# Altium PCB PCB_door_key.PcbDoc
Units mil, origin at the board's own origin, x right, y up, seen from the top; angles counter-clockwise.
Board outline 6000 x 4000 mil, 2 copper layers (Top Layer, Bottom Layer); 7 components, 17 nets, 39 pads, 0 vias.
Unrouted connection lines stored in the file: 13.
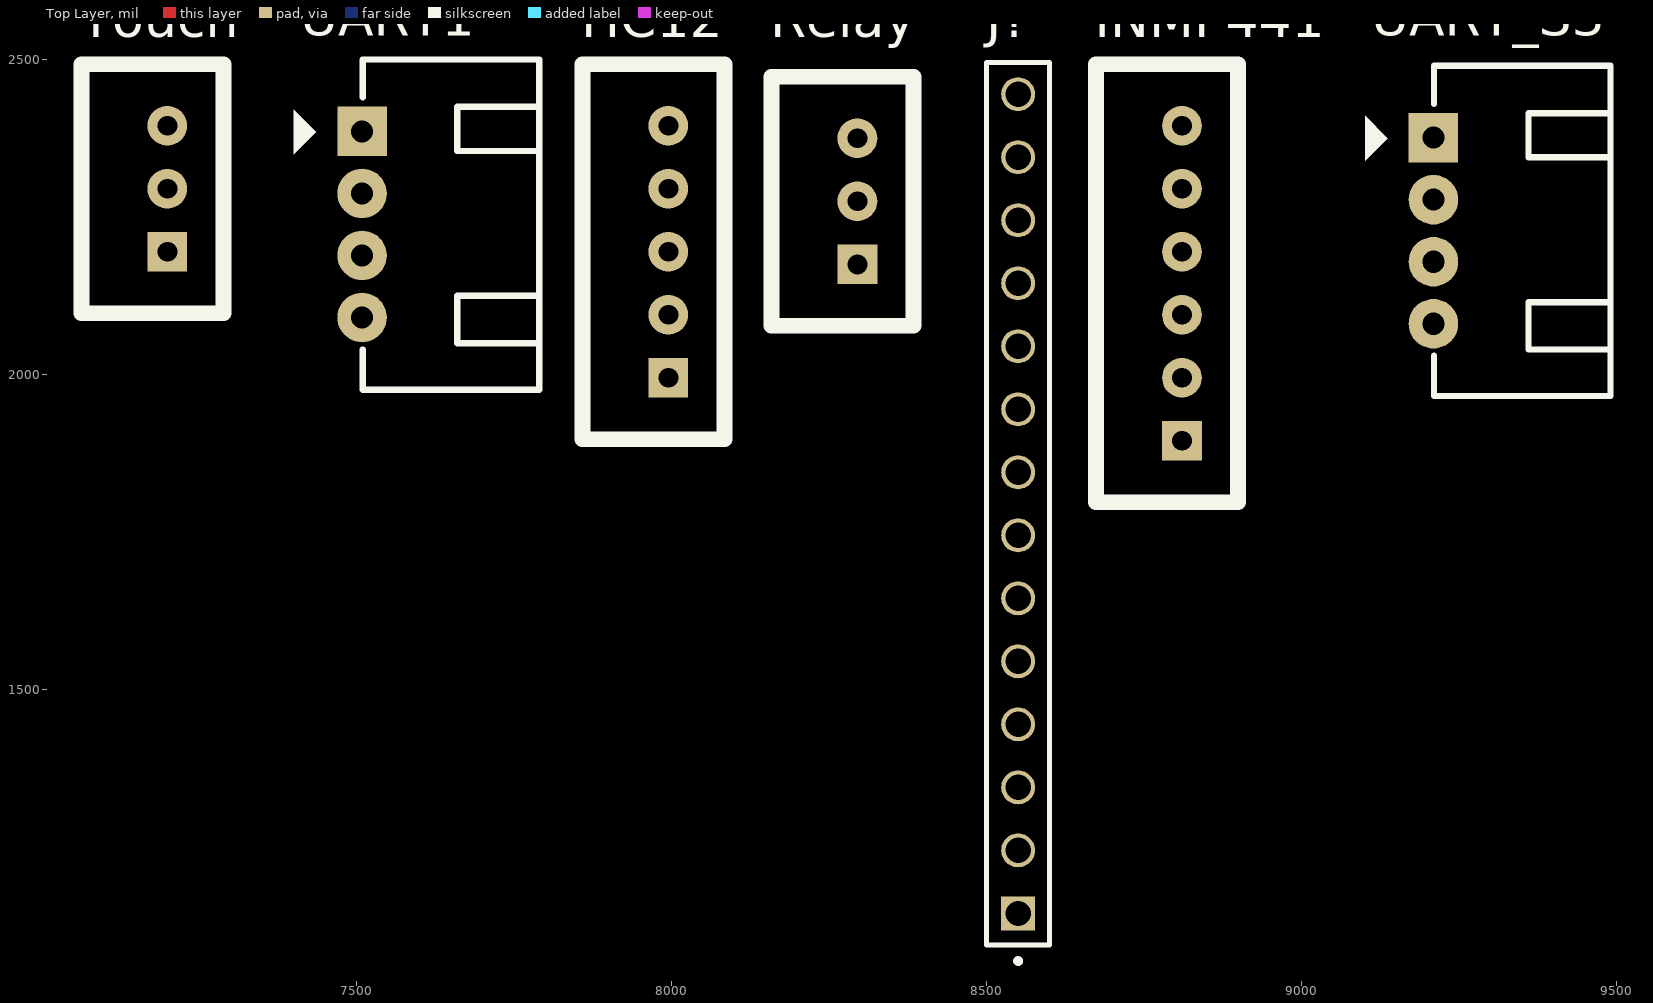
[diagram p0: Top Layer view]
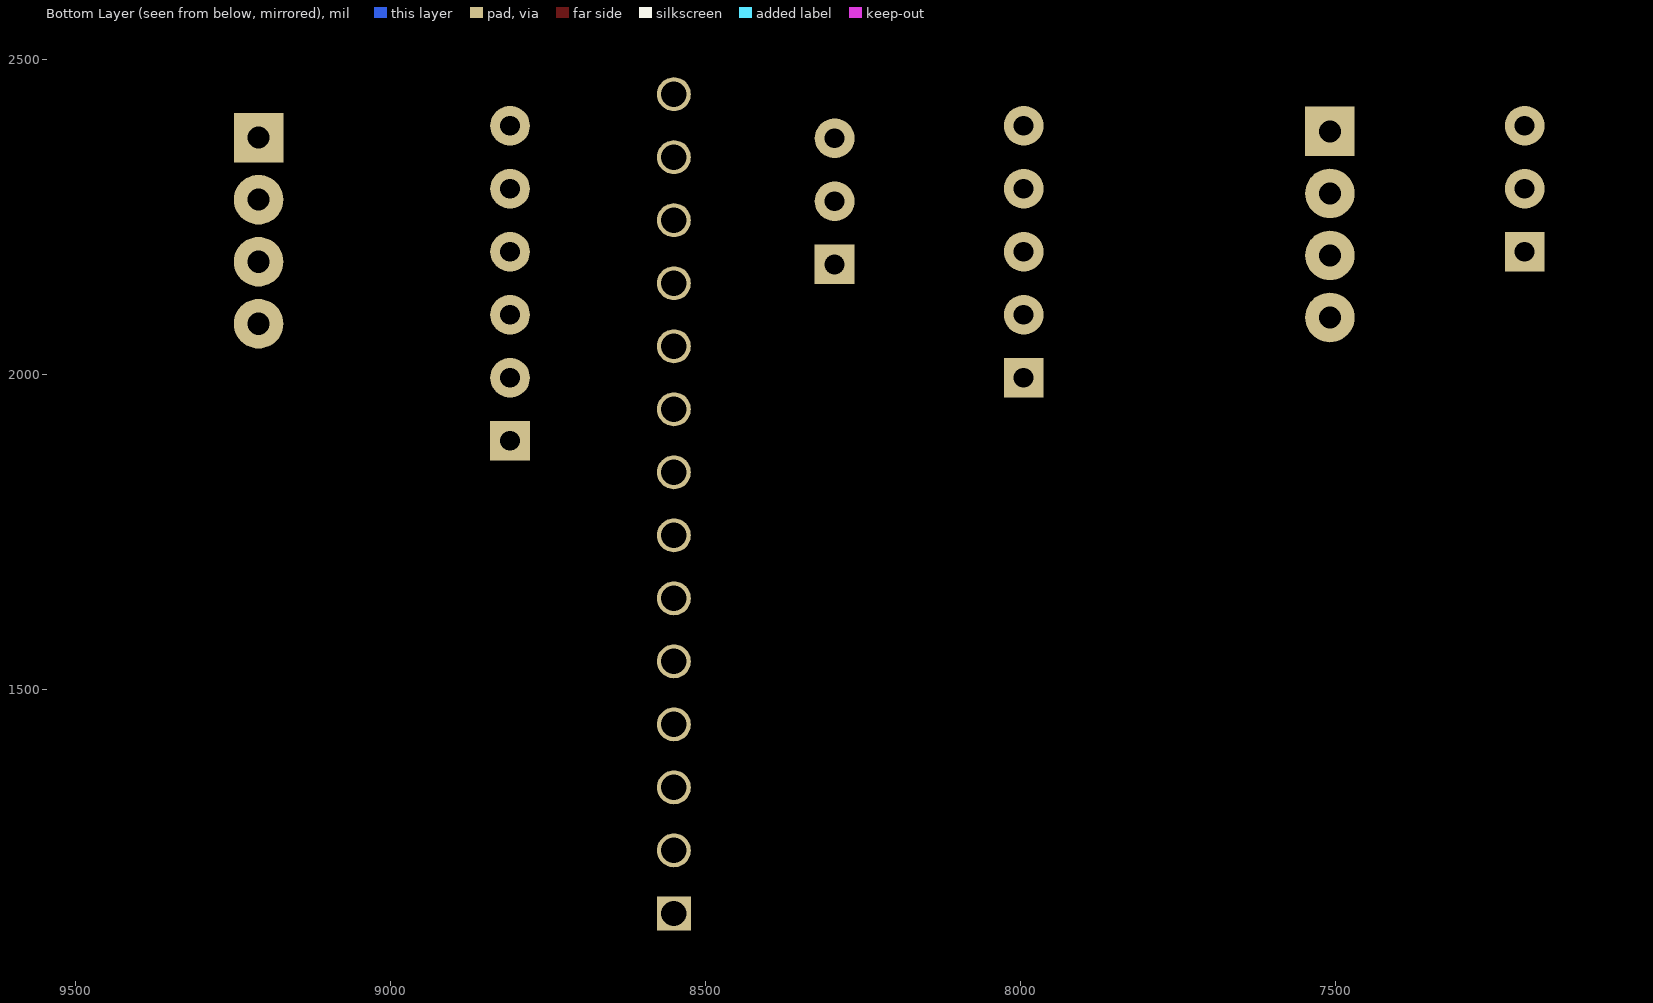
[diagram p1: Bottom Layer view, seen from below]

## Layer stack, top to bottom
Top Solder: solder mask 0.4, Solder Resist, Dk 3.5
Top Layer: signal copper 1.4
Dielectric 1: dielectric 12.6, FR-4, Dk 4.8
Bottom Layer: signal copper 1.4
Bottom Solder: solder mask 0.4, Solder Resist, Dk 3.5

## Board outline
1000,1000 7000,1000 7000,5000 1000,5000

## Design rules (kind name [scope] priority, off if disabled: settings)
Clearance [All] p1: gap=10 ignorepadtopadclearanceinfootprint=FALSE
PolygonConnect [All] p1: connectstyle=Relief reliefconductorwidth=10 reliefentries=4 polygonreliefangle="90 Angle" airgapwidth=10
RoomDefinition Sch_door_key [InComponentClass('Sch_door_key')] p1: confinementstyle=ConfineIn formatcopy=TRUE lockcomponents=FALSE outline 7045,1055 9530,1055 9530,2615 7045,2615
RoutingVias [All] p1: holewidth=28 width=50 viastyle="Through Hole" minholewidth=28 minwidth=50 maxholewidth=28 maxwidth=50
SolderMaskExpansion [All] p1: expansion=4 istentingtop=FALSE
Width [All] p1: maxlimit=10 minlimit=10 preferedwidth=10
30 further rules are at their usual default settings.

## Components (designator, comment, footprint, x,y, rotation, side; value= is the part's Value field where it differs from the comment)
HC12 "HC-12" XH2.54M-5 7995,1995 r90 top
INMP441 "INMP441" XH2.54M-6 8810,1895 r90 top
J? "Display" SAMTEC_TSW-114-07-L-S-LL 8550,1145 r90 top
Relay "Servo" XH2.54M-3 8295,2175 r90 top
Touch "IR_Receive" XH2.54M-3 7200,2195 r90 top
UART1 "UART1" "Header 4P DC 2.54" 7510,2385 r0 top
UART_S3 "UART_S3" "Header 4P DC 2.54" 9210,2375 r0 top

## Footprints (in the part's own frame and the unit in brackets; to place one, negate y for a bottom-side part, rotate by r counter-clockwise, add the part's x,y. Pads: shape width x height; smd on the part's side, far side on the other; paste and mask are expansions set on the pad)
"Header 4P DC 2.54" [mil]
  rect 78.74x78.74 hole 35: 1(-1,1)
  round 78.74 hole 35: 2(-1,-97.43) 3(-1,-195.85) 4(-1,-294.28)
  silkscreen extent -110,-409 280,115, body extent 5,-413 278,123, height 290
SAMTEC_TSW-114-07-L-S-LL [mm]
  rect 1.37x1.37 hole 1.02: 01(0,0)
  round 1.37 hole 1.02: 02(2.54,0) 03(5.08,0) 04(7.62,0) 05(10.16,0) 06(12.7,0) 07(15.24,0) 08(17.78,0) 09(20.32,0) 10(22.86,0) 11(25.4,0) 12(27.94,0) 13(30.48,0) 14(33.02,0)
  silkscreen extent -2.02,-1.27 34.29,1.27
XH2.54M-3 [mm]
  rect 1.6x1.6 hole 0.8: 1(0,0)
  round 1.6 hole 0.8: 2(2.54,0) 3(5.08,0)
  silkscreen extent -2.48,-2.26 7.56,3.46, body extent -2.48,-2.26 7.56,3.48, height 6.91
XH2.54M-5 [mm]
  rect 1.6x1.6 hole 0.8: 1(0,0)
  round 1.6 hole 0.8: 2(2.54,0) 3(5.08,0) 4(7.62,0) 5(10.16,0)
  silkscreen extent -2.48,-2.26 12.64,3.46, body extent -2.48,-2.26 12.64,3.48, height 6.91
XH2.54M-6 [mm]
  rect 1.6x1.6 hole 0.8: 1(0,0)
  round 1.6 hole 0.8: 2(2.54,0) 3(5.08,0) 4(7.62,0) 5(10.16,0) 6(12.7,0)
  silkscreen extent -2.48,-2.26 15.18,3.46, body extent -2.48,-2.26 15.18,3.48, height 6.91

## Part data
HC12: library part "Header 5P 2.54 Duc Thang", "Cắm", Chung_Loai=Cắm, Don_Vi=Con, Ma_Hang=MH001298, Ten_Linh_Kien="Header 5P XH2.54-5P Đực Thẳng"
INMP441: library part "Header 6P 2.54 Duc Thang", "Cắm", Chung_Loai=Cắm, Don_Vi=Con, Ma_Hang=MH001972, Ten_Linh_Kien="Header 6P XH2.54-6P Đực Thẳng"
J?: library part TSW-114-07-L-S-LL, Package=None, Availability=Unavailable, MP=TSW-114-07-L-S-LL, Price=None
Relay Touch: library part "Header 3P 2.54 Duc Thang", "Cắm", Chung_Loai=Cắm, Don_Vi=Con, Ma_Hang=MH001292, Ten_Linh_Kien="Header 3P XH2.54-3P Đực Thẳng"
UART1 UART_S3: library part "Header 4P 2.54 Duc Cong", "Cắm", Chung_Loai=Cắm, Don_Vi=Con, Ma_Hang=MH001310, Ten_Linh_Kien="Header 4P XH2.54-4P Đực Cong"

## Nets (pads, with @x,y where several pads share a name; then routed paths per layer and width w, separated by ;. In a path a pad name is that pad's centre, name@x,y a point inside that pad or via, vN(x,y) a via of type N, cw(c..) or ccw(c..) an arc to the next point about the centre after c; other vN are vias at no path point)
BCLK: 
DIN: 
GAIN: 
GND: HC12.4 INMP441.1 INMP441.4 Relay.3 Touch.3 UART1.1 UART_S3.1
IO: Touch.2
LRC: 
NetU2_J1_1: 
NetU2_J1_10: UART_S3.3
NetU2_J1_11: UART_S3.4
RX2: HC12.2 UART1.3
SCK: INMP441.6
SD: INMP441.3
SET: HC12.1
SIG: Relay.1
TX2: HC12.3 UART1.4
VCC: HC12.5 INMP441.2 Relay.2 Touch.1 UART1.2 UART_S3.2
WS: INMP441.5
pads on no net: J?.01 J?.02 J?.03 J?.04 J?.05 J?.06 J?.07 J?.08 J?.09 J?.10 J?.11 J?.12 J?.13 J?.14